# Altium PCB PCB1.PcbDoc
Units mm, origin at the board's own origin, x right, y up, seen from the top; angles counter-clockwise.
Board outline 152.4 x 101.6 mm, 2 copper layers (Top Layer, Bottom Layer); 71 components, 60 nets, 207 pads, 55 vias.
Unrouted connection lines stored in the file: 1.
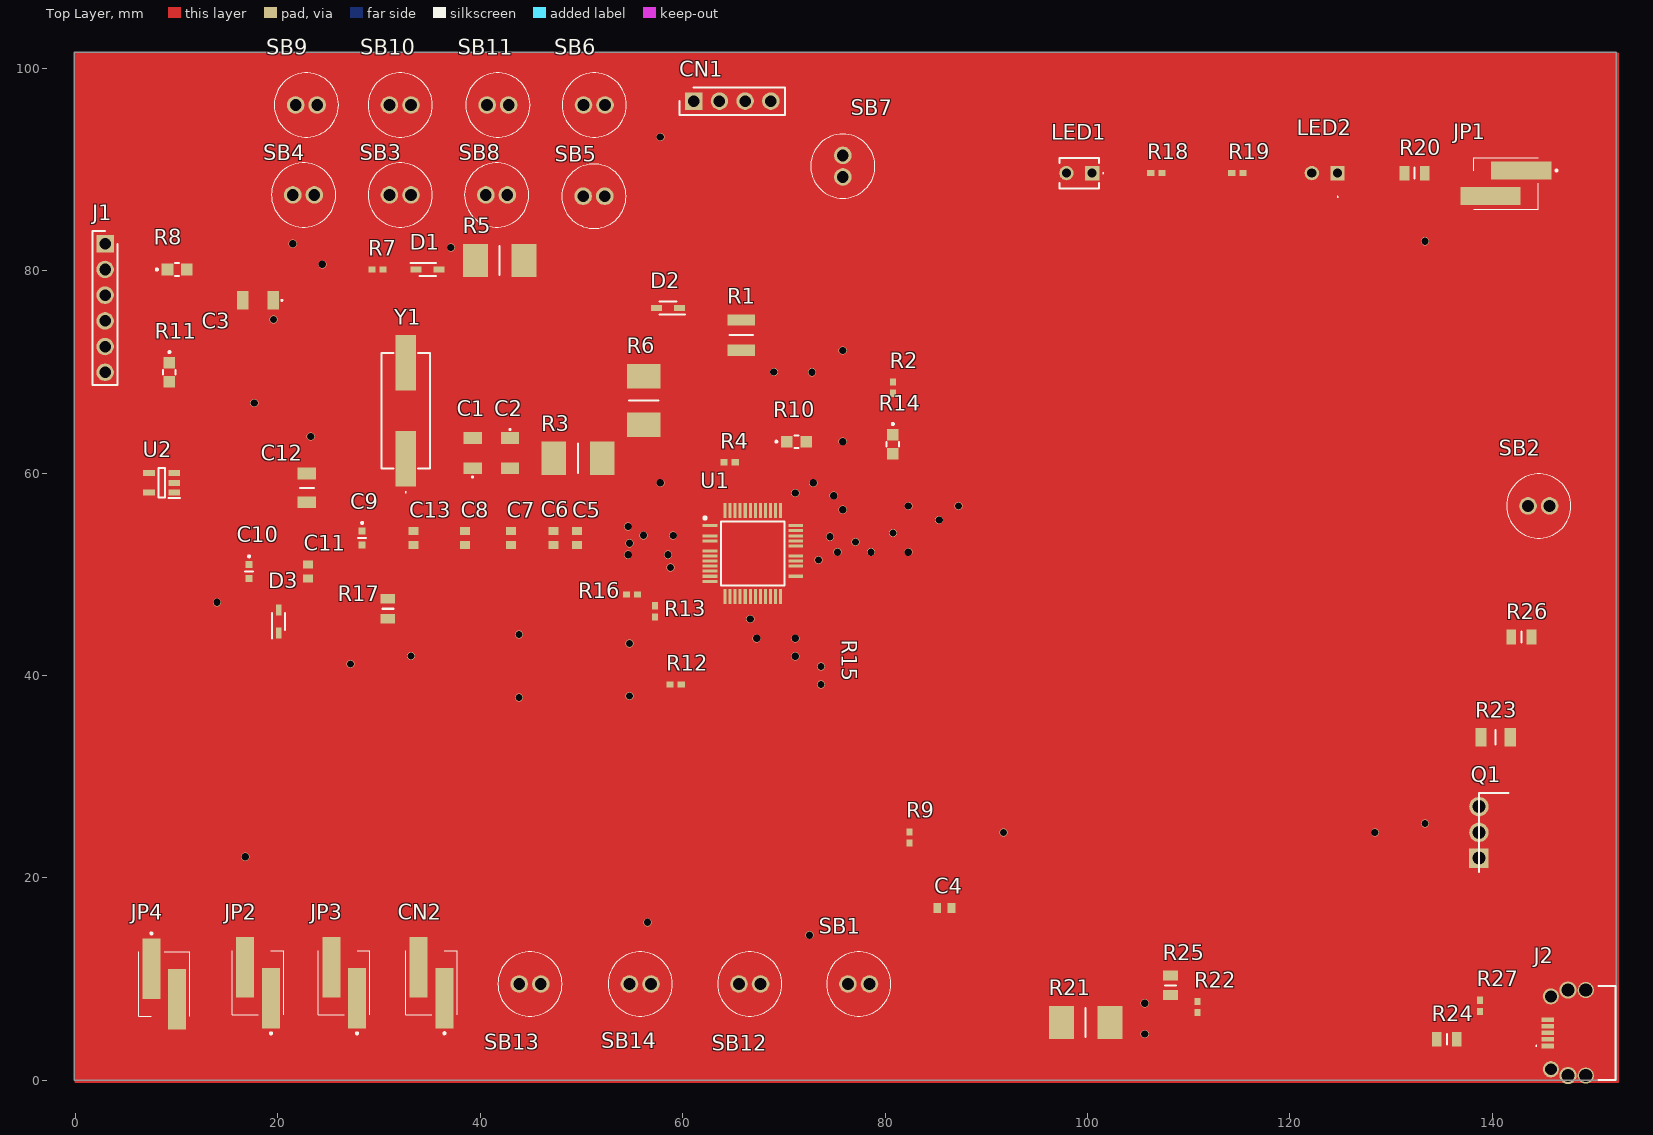
[diagram p0: Top Layer view]
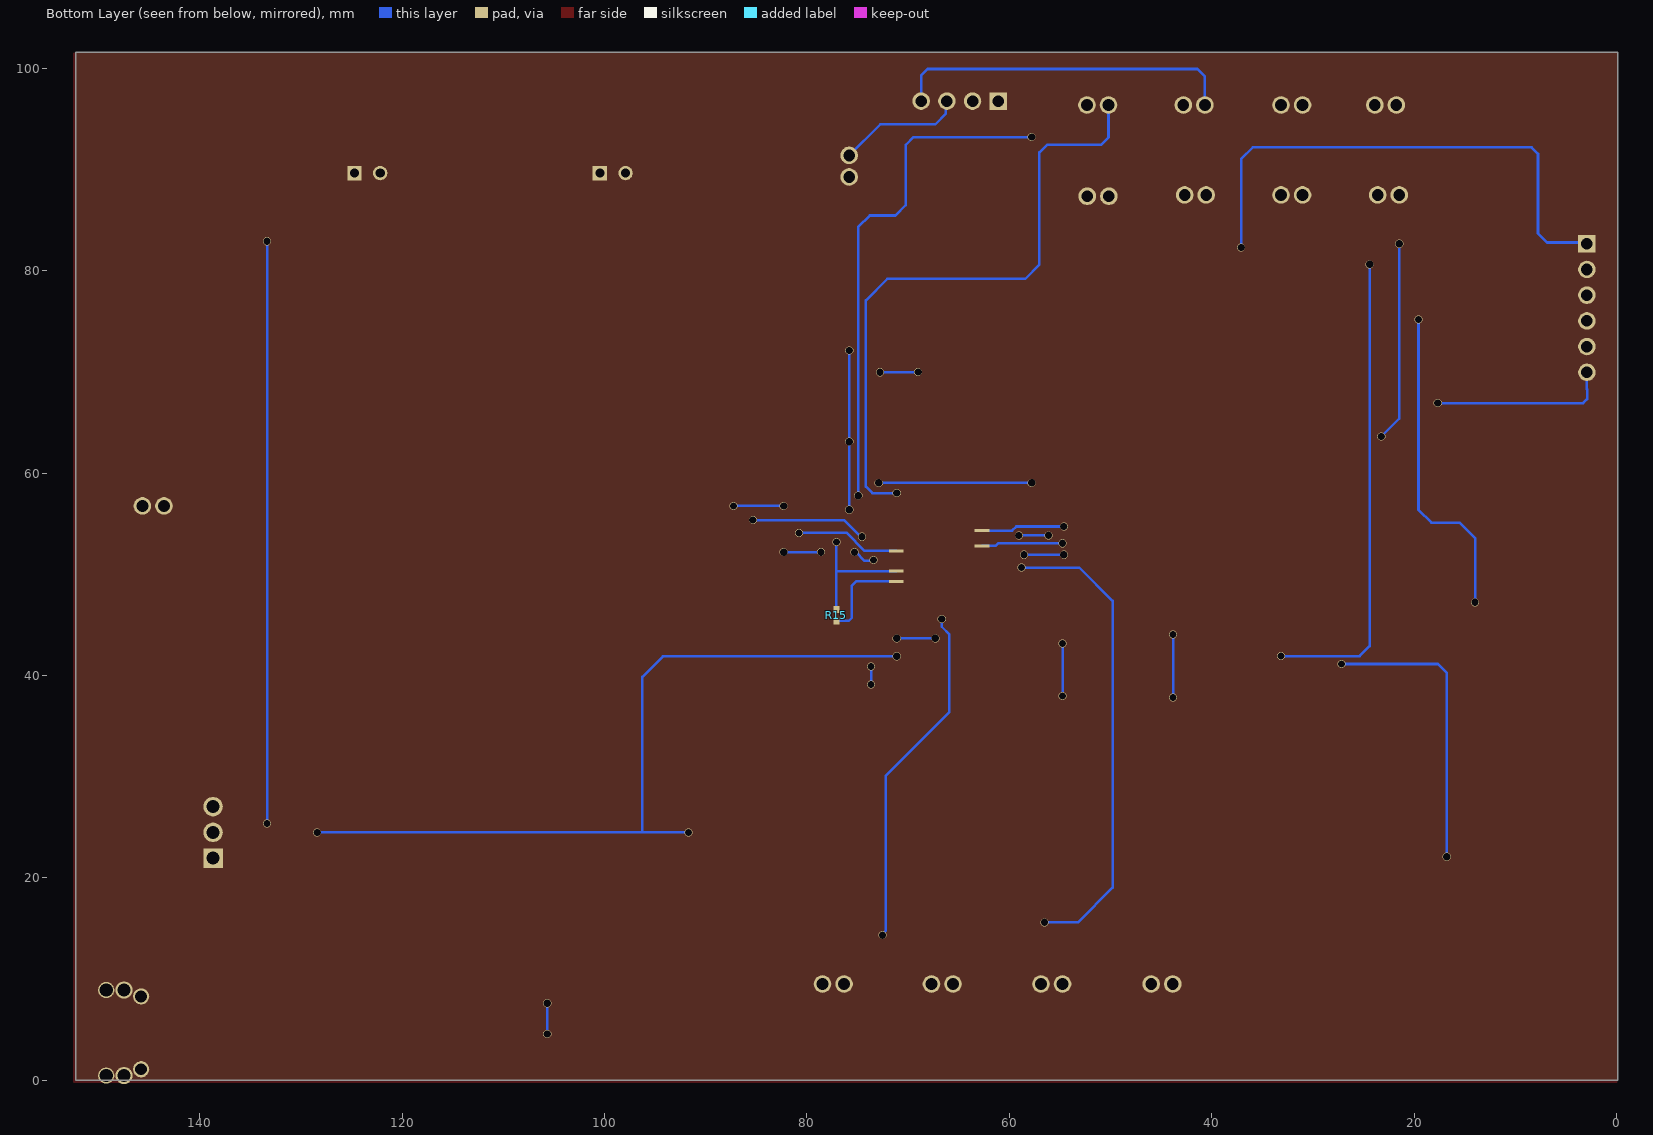
[diagram p1: Bottom Layer view, seen from below]
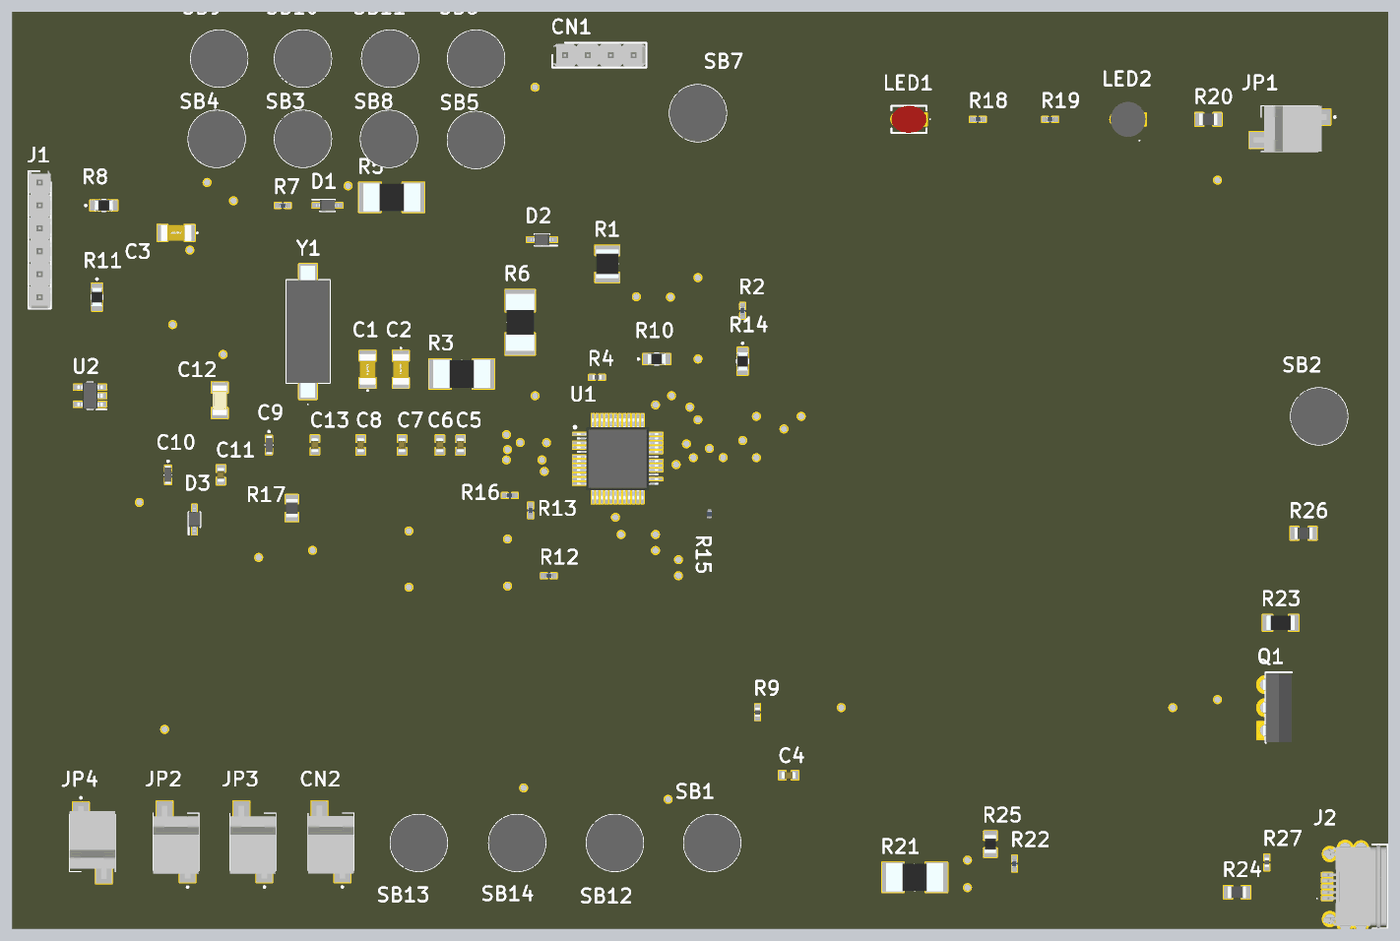
[diagram p2: 3D render of the assembled board from above, using the file's embedded part models]

## Layer stack, top to bottom
Top Solder: solder mask 0.0102, Solder Resist, Dk 3.5
Top Layer: signal copper 0.0356
Dielectric 1: dielectric 0.32, FR-4, Dk 4.8
Bottom Layer: signal copper 0.0356
Bottom Solder: solder mask 0.0102, Solder Resist, Dk 3.5

## Board outline
-0.127,0 152.273,0 152.273,101.6 -0.127,101.6

## Design rules (kind name [scope] priority, off if disabled: settings)
Clearance [All] p1: gap=0.254 ignorepadtopadclearanceinfootprint=FALSE
PolygonConnect [All] p1: connectstyle=Relief reliefconductorwidth=0.254 reliefentries=4 polygonreliefangle="90 Angle" airgapwidth=0.254
RoutingVias [All] p1: holewidth=0.711 width=1.27 viastyle="Through Hole" minholewidth=0.711 minwidth=1.27 maxholewidth=0.711 maxwidth=1.27
SolderMaskExpansion [All] p1: expansion=0.102 istentingtop=FALSE
Width [All] p1: maxlimit=0.254 minlimit=0.254 preferedwidth=0.254
30 further rules are at their usual default settings.

## Components (designator, comment, footprint, x,y, rotation, side; value= is the part's Value field where it differs from the comment)
C1 "20pF" C1206 39.243,61.976 r90 top
C2 "20pF" C1206 42.926,61.976 r270 top
C3 "20pF" C1206 18.034,77.089 r180 top
C4 "100nF" CAPC1608X90N 85.852,17.018 r180 top
C5 "100nF" CAPC1608X90N 49.53,53.594 r270 top
C6 "100nF" CAPC1608X90N 47.244,53.594 r270 top
C7 "100nF" CAPC1608X90N 43.053,53.594 r270 top
C8 "100nF" CAPC1608X90N 38.481,53.594 r270 top
C9 "1uF_X5R_0603" MAJx16 28.321,53.594 r270 top
C10 "1uF_X5R_0603" MAJx16 17.145,50.292 r270 top
C11 "100nF" CAPC1608X90N 22.987,50.292 r270 top
C12 "10nF X7R 0603" CAPC3316X145N 22.86,58.547 r90 top
C13 "100nF" CAPC1608X90N 33.401,53.594 r270 top
CN1 "22-28-4042" HDRV4W66P0X254_1X4_1016X249X1003P 61.087,96.774 r0 top
CN2 "3-647166-2" 36471662 35.179,9.656 r0 top
D1 "BAT60JFILM" SOD2513X117N 34.798,80.137 r0 top
D2 "BAT60JFILM" SOD2513X117N 58.547,76.327 r180 top
D3 "BAT60JFILM" SOD2513X117N 20.066,45.339 r90 top
J1 "22-28-4062" HDRV6W66P0X254_1X6_1524X249X838P 2.921,82.677 r270 top
J2 "204926-1103" 2049261103 148.717,4.699 r90 top
JP1 "3-647166-2" 36471662 141.351,88.646 r90 top
JP2 "3-647166-2" 36471662 18.034,9.652 r0 top
JP3 "3-647166-2" 36471662 26.543,9.652 r0 top
JP4 "3-647166-2" 36471662 8.763,9.525 r180 top
LED1 "RED" C4SMARGYCS4V1BB1 100.457,89.662 r180 top
LED2 "GREEN" C4SMAGGYCU2W37A1 124.714,89.662 r180 top
Q1 "BD139" TO254P290X760X1320-3P 138.684,21.971 r90 top
R1 "2K7" RESC3225X70N 65.786,73.66 r270 top
R2 "4K7" RESC1005X37N#1 80.772,68.453 r270 top
R3 "CRM2512QJW-103ELF" RESC6331X80N 49.657,61.468 r0 top
R4 "100K" RESC1005X40N 64.643,61.087 r0 top
R5 "CRM2512QJW-103ELF" RESC6331X80N 41.91,81.026 r0 top
R6 "CRM2512QJW-103ELF" RESC6331X80N 56.134,67.183 r270 top
R7 "MCS04020C1000FE000" RESC1005X37N#1 29.845,80.137 r180 top
R8 "ERA-6AHD220V" ERA6AEB1020V 10.033,80.137 r0 top
R9 "100K" RESC1005X40N 82.423,24.003 r90 top
R10 "ERA-6AHD220V" ERA6AEB1020V 71.247,63.119 r0 top
R11 "ERA-6AHD220V" ERA6AEB1020V 9.271,69.977 r270 top
R12 "100" RESC1005X37N#1 59.309,39.116 r180 top
R13 "4K7" RESC1005X37N#1 57.277,46.355 r90 top
R14 "ERA-6AHD220V" ERA6AEB1020V 80.772,62.865 r270 top
R15 "100" RESC1005X37N#2 77.089,45.974 r270 top
R16 "4K7" RESC1005X37N#1 54.991,48.006 r0 top
R17 "N/A" RESC2013X84N 30.861,46.609 r90 top
R18 "MCS04020C1000FE000" RESC1005X37N#1 106.807,89.662 r180 top
R19 "MCS04020C1000FE000" RESC1005X37N#1 114.808,89.662 r0 top
R20 "WSL080500000ZEA9" RESC2013X84N 132.334,89.662 r0 top
R21 "CRM2512QJW-103ELF" RESC6331X80N 99.822,5.715 r180 top
R22 "100" RESC1005X37N#1 110.871,7.239 r270 top
R23 "1K5" RESC3116X65N 140.335,33.909 r180 top
R24 "0" RESC2013X84N 135.509,4.064 r0 top
R25 "30K" RESC2012X55N 108.204,9.398 r270 top
R26 "0" RESC2013X84N 142.875,43.815 r0 top
R27 "100K" RESC1005X40N 138.811,7.366 r270 top
SB1 "8631CQD2" 8631CQD2 76.327,9.525 r0 top
SB2 "8631CQD2" 8631CQD2 143.539,56.769 r0 top
SB3 "8631CQD2" 8631CQD2 33.147,87.503 r180 top
SB4 "8631CQD2" 8631CQD2 23.593,87.503 r180 top
SB5 "8631CQD2" 8631CQD2 50.165,87.376 r0 top
SB6 "8631CQD2" 8631CQD2 52.324,96.393 r180 top
SB7 "8631CQD2" 8631CQD2 75.819,89.281 r90 top
SB8 "8631CQD2" 8631CQD2 42.672,87.503 r180 top
SB9 "8631CQD2" 8631CQD2 21.746,96.393 r0 top
SB10 "8631CQD2" 8631CQD2 31.017,96.393 r0 top
SB11 "8631CQD2" 8631CQD2 40.669,96.393 r0 top
SB12 "8631CQD2" 8631CQD2 65.561,9.525 r0 top
SB13 "8631CQD2" 8631CQD2 45.974,9.525 r180 top
SB14 "8631CQD2" 8631CQD2 56.867,9.525 r180 top
U1 "STM32F103CBT6" QFP50P900X900X160-48N 66.929,52.07 r0 top
U2 "LD3985M33R" SOT95P280X145-5N 8.509,59.055 r180 top
Y1 "8MHz(12pF)" ECS80125PXGMTR 32.639,66.167 r90 top

## Footprints (in the part's own frame and the unit in brackets; to place one, negate y for a bottom-side part, rotate by r counter-clockwise, add the part's x,y. Pads: shape width x height; smd on the part's side, far side on the other; paste and mask are expansions set on the pad)
8631CQD2 [mm]
  round 1.74 hole 1.16: 1(0,0) 2(2.13,0)
  silkscreen extent -2.11,-3.17 4.24,3.17, body extent -2.11,-3.17 4.24,3.17, height 14.03
36471662 [mm]
  rect 1.78x5.97 smd: 1(1.27,-1.52) 2(-1.27,1.52)
  silkscreen extent -2.54,-5.1 2.54,3.17, body extent -2.54,-4.08 2.54,4, height 10.55
2049261103 [mm]
  rect 0.45x1.2 smd: 1(-1.3,3.225) 2(-0.65,3.225) 3(0,3.225) 4(0.65,3.225) 5(1.3,3.225)
  round 1.6 hole 1.17: MH1(-3.6,2.925) MH2(3.6,2.925)
  round 1.7 hole 1.3: MH3(-4.225,1.225) MH4(4.225,1.225)
  round 1.6 hole 1.3: MH5(-4.225,-0.525) MH6(4.225,-0.525)
  silkscreen extent -4.65,-3.47 4.65,4.4, body extent -4.65,-3.32 4.65,3.68, height 3.83
C4SMAGGYCU2W37A1 [mm]
  rect 1.416x1.416 hole 0.91: 1(0,0)
  round 1.416 hole 0.91: 2(2.54,0)
  silkscreen extent -0.05,2.3 0.05,2.4, body extent -0.68,-1.95 3.22,1.95, height 8.9
C4SMARGYCS4V1BB1 [mm]
  rect 1.416x1.416 hole 0.91: 1(0,0)
  round 1.416 hole 0.91: 2(2.54,0)
  silkscreen extent -1.13,-1.5 3.22,1.5, body extent -0.68,-1.5 3.22,1.5, height 10.14
C1206 [mm]
  rect 1.15x1.8 smd: 1(-1.5,0) 2(1.5,0)
  silkscreen extent -2.4,-0.05 -2.3,0.05, body extent -1.7,-0.9 1.7,0.9, height 1.75
CAPC1608X90N [mm]
  rect 0.78x0.99 smd: 1(-0.7,0) 2(0.7,0)
  body extent -0.8,-0.41 0.8,0.41, height 0.9
CAPC3316X145N [mm]
  rect 1.17x1.82 smd: 1(-1.42,0) 2(1.42,0)
  silkscreen extent 0,-0.7 0,0.7, body extent -1.65,-0.8 1.65,0.8, height 1.68
ECS80125PXGMTR [mm]
  rect 5.5x2 smd: 1(-4.75,0) 2(4.75,0)
  silkscreen extent -8.1,-2.4 5.7,2.4, body extent -7.3,-2.4 7.3,2.4, height 4.4
ERA6AEB1020V [mm]
  rect 1.15x1.15 smd: 1(-0.95,0) 2(0.95,0)
  silkscreen extent -2.1,-0.63 0.2,0.63, body extent -1,-0.63 1,0.63, height 0.5
HDRV4W66P0X254_1X4_1016X249X1003P [mm]
  rect 1.725x1.725 hole 1.15: 1(0,0)
  round 1.725 hole 1.15: 2(2.54,0) 3(5.08,0) 4(7.62,0)
  silkscreen extent -1.4,-1.37 9.02,1.37, body extent -1.27,-1.24 8.89,1.24, height 9.78
HDRV6W66P0X254_1X6_1524X249X838P [mm]
  rect 1.725x1.725 hole 1.15: 1(0,0)
  round 1.725 hole 1.15: 2(2.54,0) 3(5.08,0) 4(7.62,0) 5(10.16,0) 6(12.7,0)
  silkscreen extent -1.27,-1.24 13.97,1.24, body extent -1.27,-1.24 13.97,1.24, height 9.65
MAJx16 [mm]
  rect 0.7x0.7 smd: 1(-0.7,0) 2(0.7,0)
  silkscreen extent -1.6,-0.4 0,0.4, body extent -0.98,-0.4 0.98,0.4, height 0.9
QFP50P900X900X160-48N [mm]
  rect 1.475x0.3 smd: 1(-4.238,2.75) 3(-4.238,1.75) 4(-4.238,1.25) 6(-4.238,0.25) 7(-4.238,-0.25) 8(-4.238,-0.75) 9(-4.238,-1.25) 10(-4.238,-1.75) 11(-4.238,-2.25) 12(-4.238,-2.75) 26(4.238,-2.25) 28(4.238,-1.25) 29(4.238,-0.75) 30(4.238,-0.25) 32(4.238,0.75) 33(4.238,1.25) 34(4.238,1.75) 35(4.238,2.25) 36(4.238,2.75)
  rect 1.475x0.3 smd far side: 2(-4.238,2.25) 5(-4.238,0.75) 25(4.238,-2.75) 27(4.238,-1.75) 31(4.238,0.25)
  rect 0.3x1.475 smd: 13(-2.75,-4.238) 14(-2.25,-4.238) 15(-1.75,-4.238) 16(-1.25,-4.238) 17(-0.75,-4.238) 18(-0.25,-4.238) 19(0.25,-4.238) 20(0.75,-4.238) 21(1.25,-4.238) 22(1.75,-4.238) 23(2.25,-4.238) 24(2.75,-4.238) 37(2.75,4.238) 38(2.25,4.238) 39(1.75,4.238) 40(1.25,4.238) 41(0.75,4.238) 42(0.25,4.238) 43(-0.25,4.238) 44(-0.75,4.238) 45(-1.25,4.238) 46(-1.75,4.238) 47(-2.25,4.238) 48(-2.75,4.238)
  silkscreen extent -4.85,-3.15 3.15,3.62, body extent -4.5,-4.5 4.5,4.5, height 1.6
RESC1005X37N#1 [mm]
  rect 0.7x0.6 smd: 1(-0.55,0) 2(0.55,0)
  body extent -0.5,-0.25 0.5,0.25, height 0.32
RESC1005X37N#2 [mm]
  rect 0.7x0.6 smd far side: 1(-0.55,0) 2(0.55,0)
  body extent -0.5,-0.25 0.5,0.25, height 0.32
RESC1005X40N [mm]
  rect 0.7x0.6 smd: 1(-0.55,0) 2(0.55,0)
  body extent -0.5,-0.25 0.5,0.25, height 0.4
RESC2012X55N [mm]
  rect 1x1.45 smd: 1(-0.95,0) 2(0.95,0)
  silkscreen extent 0,-0.53 0,0.53, body extent -1,-0.63 1,0.63, height 0.55
RESC2013X84N [mm]
  rect 0.95x1.45 smd: 1(-1,0) 2(1,0)
  silkscreen extent 0,-0.54 0,0.54, body extent -1.01,-0.64 1.01,0.64, height 0.36
RESC3116X65N [mm]
  rect 1.1x1.8 smd: 1(-1.45,0) 2(1.45,0)
  silkscreen extent 0,-0.7 0,0.7, body extent -1.55,-0.8 1.55,0.8, height 0.65
RESC3225X70N [mm]
  rect 1.1x2.7 smd: 1(-1.5,0) 2(1.5,0)
  silkscreen extent 0,-1.15 0,1.15, body extent -1.6,-1.25 1.6,1.25, height 0.7
RESC6331X80N [mm]
  rect 2.45x3.3 smd: 1(-2.4,0) 2(2.4,0)
  silkscreen extent 0,-1.45 0,1.45, body extent -3.15,-1.55 3.15,1.55, height 0.8
SOD2513X117N [mm]
  rect 1.085x0.55 smd: 1(-1.14,0) 2(1.14,0)
  silkscreen extent -1.68,-0.64 0.83,0.64, body extent -1.25,-0.64 1.25,0.64, height 1.17
SOT95P280X145-5N [mm]
  rect 1.15x0.6 smd: 1(-1.25,0.95) 2(-1.25,0) 3(-1.25,-0.95) 4(1.25,-0.95) 5(1.25,0.95)
  silkscreen extent -1.83,-1.48 0.33,1.5, body extent -1.4,-1.48 1.4,1.48, height 1.45
TO254P290X760X1320-3P [mm]
  rect 1.92x1.92 hole 1.28: 1(0,0)
  round 1.92 hole 1.28: 2(2.54,0) 3(5.08,0)
  silkscreen extent -1.36,-2.9 6.44,0, body extent -1.26,-2.9 6.34,0.26, height 12.92

## Part data
C1 C2 C3: library part C1206C200KCGACTU, "Capacitor", Manufacturer_Name=KEMET, Datasheet Link=https://content.kemet.com/datasheets/KEM_C1009_C0G_HV_SMD.pdf, Manufacturer_Part_Number=C1206C200KCGACTU
C4 C5 C6 C7 C8 C11 C13: library part 06035C104K4T4A, "Capacitor", Manufacturer_Name="Kyocera AVX", Mouser Part Number=581-06035C104K4T4A, Arrow Part Number=06035C104K4T4A, Arrow Price/Stock=https://www.arrow.com/en/products/06035c104k4t4a/avx, Datasheet Link=https://componentsearchengine.com/Datasheets/1/06031A100FAT2A.pdf, Height=0.9mm, Manufacturer_Part_Number=06035C104K4T4A, Mouser Price/Stock=https://www.mouser.co.uk/ProductDetail/KYOCERA-AVX/06035C104K4T4A?qs=NBj5Hwer2CEXBYKT%252BbuSBA%3D%3D
C9 C10: library part MAJCT168BB7105KTEA01, "Capacitor", Manufacturer_Name="TAIYO YUDEN", Datasheet Link=https://ds.yuden.co.jp/TYCOMPAS/or/detail?pn=MAJCT168BB7105KTEA01, Height=0.8mm, Manufacturer_Part_Number=MAJCT168BB7105KTEA01
C12: library part KGM31GCG2J103JU, "Capacitor", Manufacturer_Name="Kyocera AVX", Mouser Part Number=581-KGM31GCG2J103JU, Datasheet Link=https://datasheets.kyocera-avx.com/HVKGM.pdf, Height=1.45mm, Manufacturer_Part_Number=KGM31GCG2J103JU, Mouser Price/Stock=https://www.mouser.co.uk/ProductDetail/KYOCERA-AVX/KGM31GCG2J103JU?qs=63Lh8XYXgjt6ivbLeGkCxg%3D%3D
CN1: "Connector", Manufacturer_Name=Molex, Mouser Part Number=538-22-28-4042, Datasheet Link=https://www.molex.com/content/dam/molex/molex-dot-com/products/automated/en-us/salesdrawingpdf/423/42375/022284042_sd.pdf?inline, Height=10.03mm, Manufacturer_Part_Number=22-28-4042, Mouser Price/Stock=https://www.mouser.co.uk/ProductDetail/Molex/22-28-4042?qs=GAPJcf4kvdu6DqYOOlzdaQ%3D%3D
CN2 JP1 JP2 JP3 JP4: "Connector", Manufacturer_Name="TE Connectivity", Mouser Part Number=571-3-647166-2, Arrow Part Number=3-647166-2, Arrow Price/Stock=https://www.arrow.com/en/products/3-647166-2/te-connectivity?region=nac, Datasheet Link=https://www.te.com/commerce/DocumentDelivery/DDEController?Action=showdoc&DocId=Customer+Drawing%7F647166%7FR1%7Fpdf%7FEnglish%7FENG_CD_647166_R1.pdf%7F3-647166-2, Height=10.66mm, Manufacturer_Part_Number=3-647166-2, Mouser Price/Stock=https://www.mouser.co.uk/ProductDetail/TE-Connectivity/3-647166-2?qs=xsTFCgGnzbJU1qz6Np9kzA%3D%3D
D1 D2 D3: "Schottky Diode", Manufacturer_Name=STMicroelectronics, Mouser Part Number=511-BAT60JFILM, Arrow Part Number=BAT60JFILM, Arrow Price/Stock=https://www.arrow.com/en/products/bat60jfilm/stmicroelectronics?region=nac, Datasheet Link=https://www.mouser.jp/datasheet/2/389/cd00001944-1795661.pdf, Height=1.17mm, Manufacturer_Part_Number=BAT60JFILM, Mouser Price/Stock=https://www.mouser.co.uk/ProductDetail/STMicroelectronics/BAT60JFILM?qs=GnFZssByvVVVnMaukcyLZg%3D%3D
J1: "Connector", Manufacturer_Name=Molex, Mouser Part Number=538-22-28-4062, Datasheet Link=https://datasheet.datasheetarchive.com/originals/distributors/SFDatasheet-1/sf-00031037.pdf, Height=8.38mm, Manufacturer_Part_Number=22-28-4062, Mouser Price/Stock=https://www.mouser.com/Search/Refine.aspx?Keyword=538-22-28-4062
J2: "Connector", Manufacturer_Name=Molex, Mouser Part Number=538-204926-1103, Arrow Part Number=204926-1103, Arrow Price/Stock=https://www.arrow.com/en/products/204926-1103/molex?region=nac, Datasheet Link=https://www.molex.com/content/dam/molex/molex-dot-com/products/automated/en-us/salesdrawingpdf/204/204926/2049261103_sd.pdf, Height=4.65mm, Manufacturer_Part_Number=204926-1103, Mouser Price/Stock=https://www.mouser.co.uk/ProductDetail/Molex/204926-1103?qs=55YtniHzbhBOQihiQOeiLg%3D%3D
LED1: library part C4SMA-RGY-CS4V1BB1, "LED", Manufacturer_Name="CREE LED", Mouser Part Number=941-C4SMARGYCS4V1BB1, Arrow Part Number=C4SMA-RGY-CS4V1BB1, Arrow Price/Stock=https://www.arrow.com/en/products/c4sma-rgy-cs4v1bb1/cree-led?region=nac, Datasheet Link=https://cree-led.com/media/documents/C4SMA-1442.pdf, Height=8.8mm, Manufacturer_Part_Number=C4SMA-RGY-CS4V1BB1, Mouser Price/Stock=https://www.mouser.co.uk/ProductDetail/Cree-LED/C4SMA-RGY-CS4V1BB1?qs=7D1LtPJG0i08%2Fw1qRIcnyw%3D%3D
LED2: library part C4SMA-GGY-CU2W37A1, "LED", Manufacturer_Name="CREE LED", Mouser Part Number=941-C4SMAGGYCU2W37A1, Datasheet Link=https://cree-led.com/media/documents/C4SMA-1442.pdf, Height=8.8mm, Manufacturer_Part_Number=C4SMA-GGY-CU2W37A1, Mouser Price/Stock=https://www.mouser.co.uk/ProductDetail/Cree-LED/C4SMA-GGY-CU2W37A1?qs=7D1LtPJG0i1gnYL5Rh9Mjg%3D%3D
Q1: "Transistor BJT NPN", Manufacturer_Name=STMicroelectronics, Mouser Part Number=511-BD139, Arrow Part Number=BD139, Arrow Price/Stock=https://www.arrow.com/en/products/bd139/stmicroelectronics?region=europe, Datasheet Link=http://www.st.com/web/en/resource/technical/document/datasheet/CD00001225.pdf, Height=2.9mm, Manufacturer_Part_Number=BD139, Mouser Price/Stock=https://www.mouser.co.uk/ProductDetail/STMicroelectronics/BD139?qs=ljbEvF4DwOPW%2FLxHSWYMMA%3D%3D
R1: library part CRCW12102K70FKEAHP, "Resistor", Manufacturer_Name=Vishay, Mouser Part Number=71-CRCW12102K70FKEAH, Datasheet Link=http://componentsearchengine.com/Datasheets/1/CRCW12102K70FKEAHP.pdf, Height=0.7mm, Manufacturer_Part_Number=CRCW12102K70FKEAHP, Mouser Price/Stock=https://www.mouser.co.uk/ProductDetail/Vishay-Dale/CRCW12102K70FKEAHP?qs=OAzHGkhREL0m0%252BU1n6AaAg%3D%3D
R2 R13 R16: library part MCS04020D4701BE000, "Resistor", Manufacturer_Name=Vishay, Mouser Part Number=594-MCS04020D4701BE0, Datasheet Link=http://www.vishay.com/docs/28705/mcx0x0xpro.pdf, Height=0.37mm, Manufacturer_Part_Number=MCS04020D4701BE000, Mouser Price/Stock=https://www.mouser.co.uk/ProductDetail/Vishay-Beyschlag/MCS04020D4701BE000?qs=ft9OtscSA3%252BR0DpF5QqL2Q%3D%3D
R3 R5 R6 R21: "Resistor", Manufacturer_Name=Bourns, Mouser Part Number=652-CRM2512QJW-103E, Arrow Part Number=CRM2512QJW-103ELF, Arrow Price/Stock=https://www.arrow.com/en/products/crm2512qjw-103elf/bourns?region=nac, Datasheet Link=http://www.bourns.com/data/global/pdfs/CRM0805_1206_2010.pdf, Height=0.8mm, Manufacturer_Part_Number=CRM2512QJW-103ELF, Mouser Price/Stock=https://www.mouser.co.uk/ProductDetail/Bourns/CRM2512QJW-103ELF?qs=8Wlm6%252BaMh8Rzg3bRHdWGsA%3D%3D
R4 R9 R27: library part SFR01MZPF1003, "Resistor", Manufacturer_Name="ROHM Semiconductor", Mouser Part Number=755-SFR01MZPF1003, Datasheet Link=https://fscdn.rohm.com/en/products/databook/datasheet/passive/resistor/chip_resistor/sfr-e.pdf, Height=0.4mm, Manufacturer_Part_Number=SFR01MZPF1003, Mouser Price/Stock=https://www.mouser.co.uk/ProductDetail/ROHM-Semiconductor/SFR01MZPF1003?qs=Mv7BduZupUj2RFL5gMaKTg%3D%3D
R7 R18 R19: "Resistor", Manufacturer_Name=Vishay, Mouser Part Number=594-MCS04020C1000FE0, Arrow Part Number=MCS04020C1000FE000, Arrow Price/Stock=https://www.arrow.com/en/products/mcs04020c1000fe000/vishay, Datasheet Link=http://www.vishay.com/docs/28705/mcx0x0xpro.pdf, Height=0.37mm, Manufacturer_Part_Number=MCS04020C1000FE000, Mouser Price/Stock=https://www.mouser.co.uk/ProductDetail/Vishay-Beyschlag/MCS04020C1000FE000?qs=7ZE6F4QMOBYkwvQlfbkT8w%3D%3D
R8 R10 R11 R14: "Resistor", Manufacturer_Name=Panasonic, Mouser Part Number=667-ERA-6AHD220V, Datasheet Link=https://industrial.panasonic.com/cdbs/www-data/pdf/RDM0000/AOA0000C307.pdf, Height=0.6mm, Manufacturer_Part_Number=ERA-6AHD220V, Mouser Price/Stock=https://www.mouser.co.uk/ProductDetail/Panasonic/ERA-6AHD220V/?qs=MNPzkKEzRtQTWqg2JSKn2A%3D%3D
R12 R15 R22: library part MCS04020C1000FE000, "Resistor", Manufacturer_Name=Vishay, Mouser Part Number=594-MCS04020C1000FE0, Arrow Part Number=MCS04020C1000FE000, Arrow Price/Stock=https://www.arrow.com/en/products/mcs04020c1000fe000/vishay, Datasheet Link=http://www.vishay.com/docs/28705/mcx0x0xpro.pdf, Height=0.37mm, Manufacturer_Part_Number=MCS04020C1000FE000, Mouser Price/Stock=https://www.mouser.co.uk/ProductDetail/Vishay-Beyschlag/MCS04020C1000FE000?qs=7ZE6F4QMOBYkwvQlfbkT8w%3D%3D
R17 R24 R26: library part WSL080500000ZEA9, "Resistor", Manufacturer_Name=Vishay, Mouser Part Number=71-WSL080500000ZEA9, Arrow Part Number=WSL080500000ZEA9, Arrow Price/Stock=https://www.arrow.com/en/products/wsl080500000zea9/vishay?region=nac, Datasheet Link=https://ad.componentsearchengine.com/Datasheets/2/WSL080500000ZEA9.pdf, Height=0.838mm, Manufacturer_Part_Number=WSL080500000ZEA9, Mouser Price/Stock=https://www.mouser.co.uk/ProductDetail/Vishay-Dale/WSL080500000ZEA9?qs=f1l5vAGoKgsImKS87N8TmQ%3D%3D
R20: "Resistor", Manufacturer_Name=Vishay, Mouser Part Number=71-WSL080500000ZEA9, Arrow Part Number=WSL080500000ZEA9, Arrow Price/Stock=https://www.arrow.com/en/products/wsl080500000zea9/vishay?region=nac, Datasheet Link=https://ad.componentsearchengine.com/Datasheets/2/WSL080500000ZEA9.pdf, Height=0.838mm, Manufacturer_Part_Number=WSL080500000ZEA9, Mouser Price/Stock=https://www.mouser.co.uk/ProductDetail/Vishay-Dale/WSL080500000ZEA9?qs=f1l5vAGoKgsImKS87N8TmQ%3D%3D
R23: library part CRCW12061K50FKEAHP, "Resistor", Manufacturer_Name=Vishay, Mouser Part Number=71-CRCW12061K50FKEAH, Arrow Part Number=CRCW12061K50FKEAHP, Arrow Price/Stock=https://www.arrow.com/en/products/crcw12061k50fkeahp/vishay?region=nac, Datasheet Link=http://componentsearchengine.com/Datasheets/1/CRCW12061K50FKEAHP.pdf, Height=0.65mm, Manufacturer_Part_Number=CRCW12061K50FKEAHP, Mouser Price/Stock=https://www.mouser.co.uk/ProductDetail/Vishay-Dale/CRCW12061K50FKEAHP?qs=k2%2FDWSARqgEwHXAQbL4aEg%3D%3D
R25: library part TNPW080536K0BEEA, "Resistor", Manufacturer_Name=Vishay, Datasheet Link=https://www.vishay.com/docs/31006/tnpw.pdf, Height=0.55mm, Manufacturer_Part_Number=TNPW080536K0BEEA
SB1 SB2 SB3 SB4 SB5 SB6 SB7 SB8 SB9 SB10 SB11 SB12 SB13 SB14: "Switch (2-Pin Push)", Manufacturer_Name="C & K COMPONENTS", Mouser Part Number=611-8631-261, Datasheet Link=https://www.ckswitches.com/media/1396/8600.pdf, Height=13.93mm, Manufacturer_Part_Number=8631CQD2, Mouser Price/Stock=https://www.mouser.co.uk/ProductDetail/CK/8631CQD2?qs=ktcBc77oICXe9iPhfEwnkA%3D%3D
U1: "Integrated Circuit", Manufacturer_Name=STMicroelectronics, Mouser Part Number=511-STM32F103CBT6, Arrow Part Number=STM32F103CBT6, Arrow Price/Stock=https://www.arrow.com/en/products/stm32f103cbt6/stmicroelectronics?region=europe, Datasheet Link=http://www.st.com/st-web-ui/static/active/en/resource/technical/document/datasheet/CD00161566.pdf, Height=1.6mm, Manufacturer_Part_Number=STM32F103CBT6, Mouser Price/Stock=https://www.mouser.co.uk/ProductDetail/STMicroelectronics/STM32F103CBT6?qs=WxFF5lh7QM3goh6GV5Ogig%3D%3D
U2: "Integrated Circuit", Manufacturer_Name=STMicroelectronics, Mouser Part Number=511-LD3985M33R, Arrow Part Number=LD3985M33R, Arrow Price/Stock=https://www.arrow.com/en/products/ld3985m33r/stmicroelectronics?region=europe, Datasheet Link=http://www.st.com/st-web-ui/static/active/en/resource/technical/document/datasheet/CD00003395.pdf, Height=1.45mm, Manufacturer_Part_Number=LD3985M33R, Mouser Price/Stock=https://www.mouser.co.uk/ProductDetail/STMicroelectronics/LD3985M33R?qs=22WmWNTp1rrPOccVv4HZ7A%3D%3D
Y1: library part ECS-80-12-5PX-GM-TR, "Crystal or Oscillator", Manufacturer_Name=ECS, Mouser Part Number=520-80-12-5PX-GM-TR, Datasheet Link=https://ecsxtal.com/store/pdf/csm-7x.pdf, Height=4.3mm, Manufacturer_Part_Number=ECS-80-12-5PX-GM-TR, Mouser Price/Stock=https://www.mouser.co.uk/ProductDetail/ECS/ECS-80-12-5PX-GM-TR?qs=amGC7iS6iy%252BwzUdIY7WpOA%3D%3D

## Via types
v1: diameter 0.8, hole 0.711, Top Layer to Bottom Layer, 55 vias

## Nets (pads, with @x,y where several pads share a name; then routed paths per layer and width w, separated by ;. In a path a pad name is that pad's centre, name@x,y a point inside that pad or via, vN(x,y) a via of type N, cw(c..) or ccw(c..) an arc to the next point about the centre after c; other vN are vias at no path point)
+3V3: R13.1
+3VC_ST_LINK: C5.2 C6.2 C7.2 C8.2 C9.2 C13.2 JP1.2 Q1.2 R9.2 R17.2 R20.2 SB4.2 U1.1 U1.9 U1.24 U1.36 U1.48 U2.5 | length 357.3
  Top Layer w0.253: 59.309,56.308 U1.48 ; 59.734,54.82 U1.1 ; 60.053,50.82 U1.9
  Top Layer w0.254: U2.5@6.878,58.105 6.157,58.105 4.445,59.817 4.445,62.992 6.223,64.77 25.4,64.77 26.416,63.754 26.416,61.976 ; v1(21.463,82.677) SB4.2 ; v1(23.241,63.627) 24.892,61.976 26.416,61.976 ; C9.2 28.321,49.592 ; R17.2 30.861,49.592 ; C13.2 33.401,49.592 ; C8.2 38.481,49.592 ; C7.2 43.053,49.592 ; C6.2 47.244,49.592 ; C5.2 49.53,49.592 ; v1(57.785,59.055) 57.785,56.325 ; 59.734,54.82 59.309,55.245 59.309,56.308 57.801,56.308 57.785,56.325 ; 60.053,50.82 58.824,49.592 57.785,49.592 ; U1.9 68.433,50.82 69.679,49.574 U1.24 69.679,42.335 70.104,41.91 v1(71.12,41.91) ; U1.36 72.515,54.82 72.898,55.203 v1(72.898,59.055) ; R9.2 82.444,24.532 91.673,24.532 v1(91.694,24.511) ; v1(128.397,24.511) 133.35,24.511 ; R20.2 133.35,89.646 133.35,87.376 ; v1(133.35,25.4) 133.35,24.511 ; v1(133.35,82.931) 133.35,87.376 ; Q1.2 133.35,24.511 ; JP1.2 133.35,87.376 ; 26.416,61.976 26.416,50.165 26.989,49.592 28.321,49.592 ; 28.321,49.592 30.861,49.592 ; 30.861,49.592 33.401,49.592 ; 33.401,49.592 38.481,49.592 ; 38.481,49.592 43.053,49.592 ; 43.053,49.592 47.244,49.592 ; 47.244,49.592 49.53,49.592 ; 49.53,49.592 57.785,49.592 ; 57.785,49.592 57.785,51.6 57.766,51.62 57.766,56.305 57.785,56.325
  Bottom Layer w0.254: v1(21.463,82.677) 21.463,65.405 v1(23.241,63.627) ; v1(57.785,59.055) v1(72.898,59.055) ; v1(71.12,41.91) 94.234,41.91 96.266,39.878 96.266,24.511 ; v1(91.694,24.511) 96.266,24.511 ; v1(128.397,24.511) 96.266,24.511 ; v1(133.35,25.4) v1(133.35,82.931)
"AIN 1": R7.2
E5V: D2.1 R1.1 | length 7
  Top Layer w0.254: D2.1 65.256,76.327 65.786,75.797 R1.1
GND: C1.2 C2.2 C3.2 C4.1 C5.1 C6.1 C7.1 C8.1 C9.1 C10.1 C11.1 C12.1 C13.1 J1.3 J2.5 JP2.1 JP3.1 JP3.2 JP4.1 JP4.2 LED1.2 R2.2 R3.1 R4.1 R5.2 R6.1 R16.1 R25.1 R27.1 SB8.2 SB12.1 U1.8 U1.20 U1.23 U1.35 U1.47 U2.2 | length 0.1
  Top Layer w0.254: C12.1@22.837,57.15 C12.1 ; J2.5@145.462,5.969 J2.5
"LED STLINK": R18.1 R19.1 U1.30 | length 81.1
  Top Layer w0.254: U1.30 72.259,51.82 72.263,51.816 72.877,51.816 73.258,51.435 v1(73.406,51.435) ; v1(75.311,52.197) v1(78.613,52.197) ; v1(82.296,52.197) 83.693,53.594 83.693,86.233 84.836,87.376 108.712,87.376 109.728,88.392 109.728,89.662 ; R18.1 109.728,89.662 ; R19.1 109.728,89.662
  Bottom Layer w0.254: v1(73.406,51.435) 73.493,51.348 74.314,51.348 75.163,52.197 v1(75.311,52.197) ; v1@78.867,52.197 v1(82.296,52.197)
NetC3_1: C3.1 R12.2 SB9.1 | length 109.2
  Top Layer w0.254: v1(13.97,47.244) 16.764,47.244 17.653,46.355 17.653,39.878 18.415,39.116 R12.2 ; v1(19.558,75.184) 19.558,77.065 C3.1 19.558,77.113 19.558,80.01 17.526,82.042 17.526,94.742 19.177,96.393 SB9.1
  Bottom Layer w0.254: v1(13.97,47.244) 13.97,53.594 15.494,55.118 18.288,55.118 19.558,56.388 v1(19.558,75.184)
NetC10_2: C10.2 C11.2 D2.2 D3.2 U2.1 U2.3 | length 111.2
  Top Layer w0.254: U2.1 9.771,58.093 11.303,58.093 ; U2.3 10.861,60.005 11.303,59.563 11.303,58.093 ; C10.2 17.145,48.133 ; D3.2 20.066,48.133 ; C11.2 22.987,48.514 22.606,48.133 20.066,48.133 ; D2.2 30.353,76.327 28.702,74.676 28.702,66.802 27.305,65.405 5.715,65.405 3.683,63.373 3.683,53.594 4.572,52.705 11.303,52.705 ; 11.303,52.705 11.303,58.093 ; 11.303,52.705 11.303,49.784 12.954,48.133 17.145,48.133 ; 17.145,48.133 20.066,48.133
NetC12_2: C12.2 U2.4 | length 25.9
  Top Layer w0.254: U2.4 5.908,60.005 5.08,60.833 5.08,62.738 6.096,63.754 21.971,63.754 22.86,62.865 C12.2
NetCN1_1: CN1.1 SB3.2 SB4.1 | length 59.2
  Top Layer w0.254: SB4.1 SB3.2 34.827,91.313 45.72,91.313 46.482,90.551 46.482,83.947 47.752,82.677 57.15,82.677 59.055,84.582 59.055,96.266 59.563,96.774 CN1.1
NetCN1_2: CN1.2 SB5.2 SB6.1 | length 28.5
  Top Layer w0.254: SB5.2 55.499,87.376 56.515,88.392 56.515,96.393 ; SB6.1 56.515,96.393 ; CN1.2 63.627,98.679 63.119,99.187 57.15,99.187 56.515,98.552 56.515,96.393
NetCN1_3: CN1.3 SB7.2 SB8.1 | length 58.1
  Top Layer w0.254: SB8.1 45.085,87.503 45.72,86.868 45.72,83.185 47.117,81.788 57.912,81.788 59.817,83.693 59.817,90.424 60.804,91.411 SB7.2
  Bottom Layer w0.254: CN1.3 66.268,96.673 66.268,95.53 67.31,94.488 72.742,94.488 SB7.2
NetCN1_4: CN1.4 SB10.2 SB11.1 | length 41.5
  Top Layer w0.254: SB10.2 SB11.1
  Bottom Layer w0.254: SB11.1 40.669,99.216 41.402,99.949 68.072,99.949 68.707,99.314 CN1.4
NetD1_1: D1.1 R7.1 | length 3.3
  Top Layer w0.254: R7.1 D1.1
NetD1_2: D1.2 J1.1 R5.1 | length 57.5
  Top Layer w0.254: D1.2 36.83,80.137 37.084,80.391 37.084,81.026 ; v1(37.084,82.296) 37.084,81.026 ; R5.1 37.084,81.026
  Bottom Layer w0.254: J1.1 3.048,82.804 6.858,82.804 7.747,83.693 7.747,91.567 8.382,92.202 35.941,92.202 37.084,91.059 v1(37.084,82.296)
NetJ1_2: J1.2 R8.1 | length 6.2
  Top Layer w0.254: J1.2 R8.1
NetJ1_4: J1.4 R10.1 | length 97.8
  Top Layer w0.254: J1.4 9.271,75.057 10.541,73.787 10.541,67.437 11.83,66.148 18.542,66.148 18.561,66.167 26.67,66.167 27.94,67.437 27.94,75.184 30.226,77.47 69.342,77.47 70.297,76.515 R10.1
NetJ1_5: J1.5 R11.1 | length 7.8
  Top Layer w0.254: J1.5 9.012,72.517 9.271,72.258 R11.1
NetJ1_6: J1.6 R14.1 | length 102.8
  Top Layer w0.254: v1(17.653,66.929) 26.035,66.929 27.051,67.945 27.051,75.565 29.972,78.486 70.612,78.486 71.882,77.216 71.882,68.326 73.152,67.056 80.137,67.056 80.772,66.421 R14.1
  Bottom Layer w0.254: J1.6 2.921,68.326 2.899,68.304 2.899,67.332 3.302,66.929 v1(17.653,66.929)
NetJ2_2: J2.2 R24.2 | length 9
  Top Layer w0.254: R24.2 136.524,4.049 J2.2
NetJ2_3: J2.3 R23.1 R26.2 | length 61
  Top Layer w0.254: R23.1 145.177,33.909 ; R26.2 144.78,43.815 145.177,43.418 145.177,33.909 ; J2.3 138.176,4.699 135.255,7.62 135.255,17.78 136.144,18.669 144.272,18.669 145.177,19.574 145.177,33.909
NetJ2_4: J2.4 R27.2 | length 7.3
  Top Layer w0.254: R27.2 140.25,6.816 141.717,5.349 J2.4
NetJP1_1: JP1.1 R1.2 R2.1 U1.39 | length 117.3
  Top Layer w0.253: 65.786,63.246 68.679,60.353 U1.39
  Top Layer w0.254: 65.786,63.246 65.786,70.019 ; R1.2 65.786,70.019 ; v1(69.003,70.019) 65.786,70.019 ; v1(72.771,69.977) 72.813,70.019 80.772,70.019 ; R2.1 80.772,70.019 ; JP1.1 142.871,91.825 141.986,92.71 97.282,92.71 95.758,91.186 95.758,89.281 94.869,88.392 84.709,88.392 82.804,86.487 82.804,70.612 82.211,70.019 80.772,70.019
  Bottom Layer w0.254: v1(69.003,70.019) 69.024,69.998 72.75,69.998 v1(72.771,69.977)
NetJP2_2: JP2.2 R17.1 U1.21 | length 91.5
  Top Layer w0.254: JP2.2 v1(16.764,22.098) ; v1(27.178,41.148) 30.861,41.148 ; R17.1 30.861,41.148 ; U1.21 68.179,42.017 67.31,41.148 30.861,41.148
  Bottom Layer w0.254: v1(16.764,22.098) 16.764,40.259 17.653,41.148 v1(27.178,41.148)
NetLED1_1: LED1.1 R18.2 | length 5.8
  Top Layer w0.254: LED1.1 R18.2
NetLED2_1: LED2.1 R20.1 | length 6.6
  Top Layer w0.254: LED2.1 R20.1
NetLED2_2: LED2.2 R19.2 | length 6.8
  Top Layer w0.254: R19.2 LED2.2
NetQ1_1: Q1.1 R21.1 R22.2 R25.2 | length 55.2
  Top Layer w0.254: R21.1 108.204,5.715 ; R25.2@108.265,8.509 R25.2 108.204,5.715 ; R22.2 110.871,5.715 ; Q1.1 133.223,21.971 132.334,21.082 132.334,7.112 130.937,5.715 110.871,5.715 ; 108.204,5.715 110.871,5.715
NetQ1_3: Q1.3 R23.2 | length 12.1
  Top Layer w0.254: Q1.3 136.398,27.051 135.763,27.686 135.763,33.02 136.652,33.909 R23.2 ; R23.2@138.949,33.972 R23.2@139.012,33.909
NetR3_2: R3.2 U1.2 | length 16.5
  Top Layer w0.254: R3.2 52.057,56.528 53.848,54.737 v1(54.61,54.737)
  Bottom Layer w0.253: 59.726,54.32 U1.2
  Bottom Layer w0.254: v1(54.61,54.737) 59.309,54.737 59.726,54.32
NetR4_2: R4.2 U1.44 | length 5.5
  Top Layer w0.254: R4.2 65.786,61.087 66.179,60.694 U1.44
NetR6_2: R6.2 U1.3 | length 17.5
  Top Layer w0.253: v1@59.083,53.82 U1.3
  Top Layer w0.254: v1(56.134,53.867) R6.2 ; v1(59.055,53.848) v1@59.083,53.82
  Bottom Layer w0.254: v1(56.134,53.867) 56.144,53.857 59.046,53.857 v1(59.055,53.848)
NetR12_1: R12.1 U1.29 | length 27.6
  Top Layer w0.253: U1.29 72.124,51.32 73.66,49.784
  Top Layer w0.254: R12.1 v1(73.66,39.116) ; v1(73.66,40.894) 73.66,49.784
  Bottom Layer w0.254: v1(73.66,39.116) v1(73.66,40.894)
NetR13_2: R13.2 R16.2 U1.10 | length 9.2
  Top Layer w0.253: 61.115,50.32 U1.10
  Top Layer w0.254: R16.2 57.277,48.006 ; R13.2 57.277,48.006 ; 61.115,50.312 61.107,50.312 58.801,48.006 57.277,48.006
NetSB1_2: SB1.2
NetSB2_2: SB2.2
NetSB5_1: SB5.1
NetSB9_2: SB9.2
NetSB10_1: SB10.1
NetSB13_1: SB13.1
NetSB14_1: SB14.1
NetU1_28: U1.28
"OSC IN": C2.1 U1.5 Y1.2 | length 46.9
  Top Layer w0.254: Y1.2 44.399,70.917 45.085,70.231 45.085,63.496 ; C2.1 45.065,63.476 45.085,63.496 ; v1(54.737,53.086) 54.229,53.086 50.165,57.15 45.974,57.15 45.085,58.039 45.085,63.496
  Bottom Layer w0.253: v1@54.756,53.067 61.106,53.067 61.353,52.82 U1.5
  Bottom Layer w0.254: v1(54.737,53.086) v1@54.756,53.067
"OSC OUT": C1.1 U1.6 Y1.1 | length 37.8
  Top Layer w0.253: 59.734,52.324 61.678,52.324
  Top Layer w0.254: 31.75,56.388 32.512,55.626 39.243,55.626 ; C1.1 39.243,55.626 ; v1(54.61,51.943) 53.721,51.943 50.038,55.626 39.243,55.626 ; v1(58.547,51.943) 59.353,51.943 59.734,52.324 ; 61.678,52.324 61.682,52.32 U1.6
  Bottom Layer w0.254: v1(54.61,51.943) v1(58.547,51.943)
"STLINK RX": SB14.2 U1.13 | length 47.3
  Top Layer w0.254: SB14.2 v1(54.737,37.973) ; v1(54.737,43.18) 63.373,43.18 64.179,43.986 U1.13
  Bottom Layer w0.254: v1(54.737,37.973) v1(54.737,43.18)
"STLINK TX": SB13.2 U1.12 | length 58.1
  Top Layer w0.254: v1(43.815,37.846) 43.83,37.831 43.83,9.539 SB13.2 ; v1(43.815,44.069) 60.198,44.069 60.833,44.704 60.833,48.895 61.258,49.32 U1.12
  Bottom Layer w0.254: v1(43.815,37.846) v1(43.815,44.069)
"STM JTCK": SB6.2 U1.37 | length 65.1
  Top Layer w0.253: U1.37 69.679,57.741 69.977,58.039 v1(71.12,58.039)
  Bottom Layer w0.254: SB6.2 50.194,93.189 50.927,92.456 56.261,92.456 57.023,91.694 57.023,80.617 58.418,79.222 72.035,79.222 74.168,77.089 74.168,58.674 73.533,58.039 v1(71.12,58.039) v1@71.108,58.039
"STM JTMS": SB11.2 U1.34 | length 92.9
  Top Layer w0.253: U1.34 72.362,53.82 72.898,54.356
  Top Layer w0.254: SB11.2 46.228,96.393 47.244,95.377 47.244,84.455 48.26,83.439 56.642,83.439 57.785,84.582 v1(57.785,93.218) ; 72.898,54.356 74.93,56.388 v1(74.93,57.785)
  Bottom Layer w0.254: v1(57.785,93.218) 69.469,93.218 70.231,92.456 70.231,86.487 71.247,85.471 73.787,85.471 74.93,84.328 v1(74.93,57.785)
"STM RST": C4.2 R9.1 SB12.2 U1.7 | length 93.3
  Top Layer w0.253: 59.944,51.816 U1.7@62.691,51.816
  Top Layer w0.254: v1(56.515,15.621) 67.691,15.621 ; v1(58.801,50.673) 59.944,51.816 ; SB12.2 67.691,15.621 ; R9.1 82.423,17.018 ; C4.2 82.423,17.018 ; 67.691,15.621 81.534,15.621 82.423,16.51 82.423,17.018
  Bottom Layer w0.254: v1(56.515,15.621) 53.213,15.621 49.784,19.05 49.784,47.371 53.086,50.673 v1(58.801,50.673)
"T JTCK": R8.2 SB3.1 U1.15 U1.26 | length 142.8
  Top Layer w0.254: R8.2 10.983,74.742 11.811,73.914 22.86,73.914 23.495,74.549 23.495,82.423 24.003,82.931 25.4,82.931 ; v1(24.384,80.645) 25.4,81.661 25.4,82.931 ; v1(33.147,41.929) 33.166,41.91 64.516,41.91 65.21,42.604 65.21,43.688 ; SB3.1 33.147,83.461 32.617,82.931 25.4,82.931 ; U1.15 65.21,47.801 65.21,43.688 ; v1(67.31,43.688) 67.291,43.707 65.229,43.707 65.21,43.688 ; v1(71.12,43.688) 72.517,43.688 73.025,44.196 73.025,49.149 72.354,49.82 U1.26
  Bottom Layer w0.254: v1(24.384,80.645) 24.384,42.926 25.381,41.929 v1(33.147,41.929) ; v1(67.31,43.688) v1(71.12,43.688)
"T JTDI": U1.17
"T JTDO": U1.16
"T JTMS": R10.2 R15.1 SB7.1 U1.27 | length 52.7
  Top Layer w0.254: R10.2 v1(75.819,63.119) ; v1(75.819,56.388) 75.819,54.737 77.089,53.467 v1@77.089,53.34 ; v1(75.819,72.136) SB7.1
  Bottom Layer w0.254: U1.27 77.061,50.32 77.089,50.292 ; v1(75.819,56.388) v1(75.819,72.136) ; R15.1 77.089,50.292 ; v1(77.089,53.213) 77.089,50.292
"T NRST": R11.2 SB1.1 U1.18 | length 189.2
  Top Layer w0.254: R11.2 9.271,67.691 7.747,66.167 5.588,66.167 3.048,63.627 3.048,4.826 5.207,2.667 70.485,2.667 72.517,4.699 72.517,9.525 ; v1(66.675,45.593) 66.679,45.597 U1.18 ; v1(72.517,14.351) 72.517,9.525 ; SB1.1 72.517,9.525
  Bottom Layer w0.254: v1(66.675,45.593) 66.675,44.831 65.913,44.069 65.913,36.408 72.222,30.099 72.222,14.773 72.517,14.477 v1(72.517,14.351)
"T SWDIO IN": R15.2 U1.25 | length 9.4
  Bottom Layer w0.254: U1.25 75.14,49.32 75.565,48.895 75.565,45.72 75.861,45.424 R15.2
"T SWO": R14.2 SB2.1 U1.31 | length 80.9
  Top Layer w0.254: v1(80.772,54.102) 80.772,56.769 ; R14.2 80.772,56.769 ; v1(82.296,56.769) 80.772,56.769 ; v1(87.249,56.769) SB2.1
  Bottom Layer w0.254: U1.31 71.169,52.322 73.067,52.322 73.069,52.324 74.295,52.324 76.092,54.121 80.753,54.121 v1(80.772,54.102) ; v1(82.296,56.769) v1(87.249,56.769)
U5V: D3.1 J2.1 R21.2 | length 170.5
  Top Layer w0.254: D3.1 20.066,40.767 20.828,40.005 21.971,40.005 93.853,40.005 94.615,39.243 94.615,5.715 ; R21.2 94.615,5.715 ; J2.1 141.829,3.399 139.573,1.143 96.012,1.143 94.615,2.54 94.615,5.715
"USB DM": R24.1 U1.32 | length 107.3
  Top Layer w0.254: U1.32 73.902,52.82 73.914,52.832 74.422,52.324 74.422,42.926 76.2,41.148 93.853,41.148 95.504,39.497 95.504,16.129 97.79,13.843 104.14,13.843 105.664,12.319 v1(105.664,7.62) ; v1(105.664,4.572) 105.752,4.572 106.26,4.064 R24.1
  Bottom Layer w0.254: v1(105.664,4.572) v1(105.664,7.62)
"USB DP": R26.1 U1.33 | length 82
  Top Layer w0.253: U1.33 72.751,53.32 73.152,53.721
  Top Layer w0.254: 73.152,53.721 v1(74.549,53.721) ; v1(85.344,55.372) 85.725,55.372 86.233,54.864 86.233,45.212 87.63,43.815 R26.1
  Bottom Layer w0.254: v1(74.549,53.721) 74.676,53.721 76.327,55.372 v1(85.344,55.372)
"USB RENUMn": R22.1 U1.38 | length 91.2
  Top Layer w0.253: U1.38 69.179,59.527 69.723,60.071
  Top Layer w0.254: 69.723,60.071 78.232,60.071 79.629,58.674 79.629,44.958 81.512,43.075 95.101,43.075 97.536,40.64 97.536,16.764 99.06,15.24 107.569,15.24 110.871,11.938 R22.1
pads on no net: CN2.1 CN2.2 J2.MH1 J2.MH2 J2.MH3 J2.MH4 J2.MH5 J2.MH6 U1.4 U1.11 U1.14 U1.19 U1.22 U1.40 U1.41 U1.42 U1.43 U1.45 U1.46
copper on no net: | length 508
  Top Layer w0.254: 0,-0.127 152.4,-0.127 152.4,101.473 0,101.473 0,-0.127

## Other copper
Top Layer:
  rectangle net GND: 0,-0.127 152.4,101.473

## Silkscreen, mask and mechanical layers (free items; w line width, h text height)
Mechanical 1:
  lines w0.254: 0,-0.127 152.4,-0.127 152.4,101.473 0,101.473 0,-0.127